# EAGLE board AQETHBluePill_w_RESET_MOD4ELECROW (EAGLE 6.5.0)
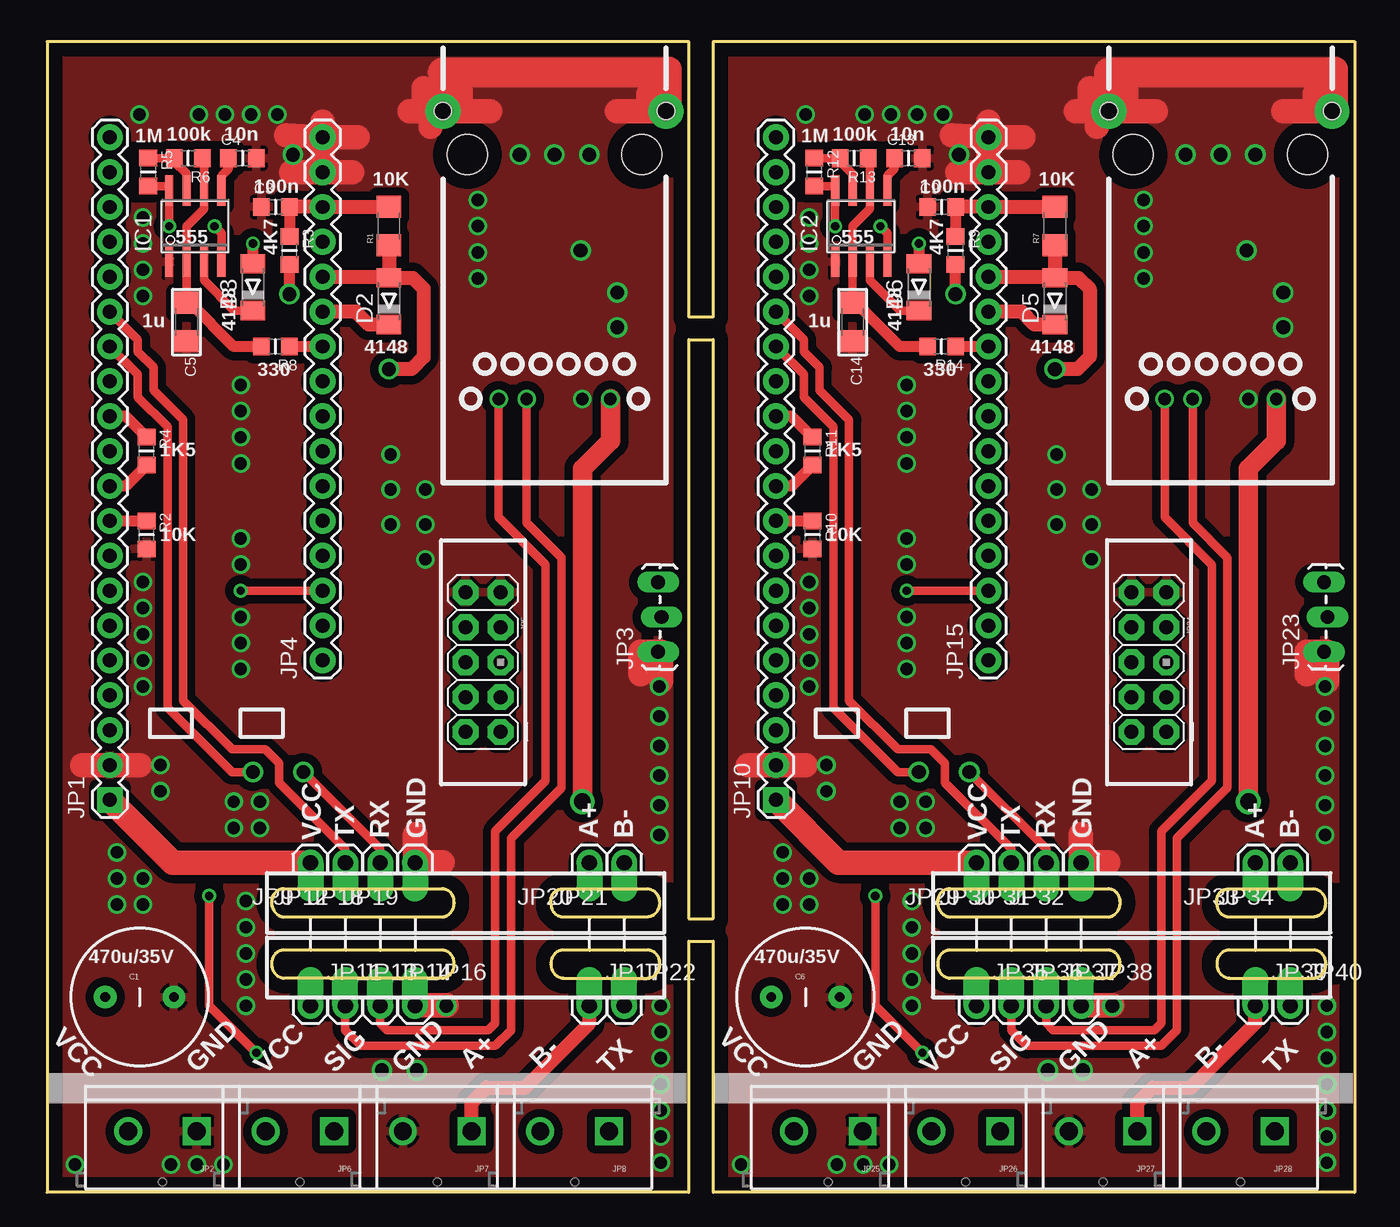
[diagram p0: board, top side]
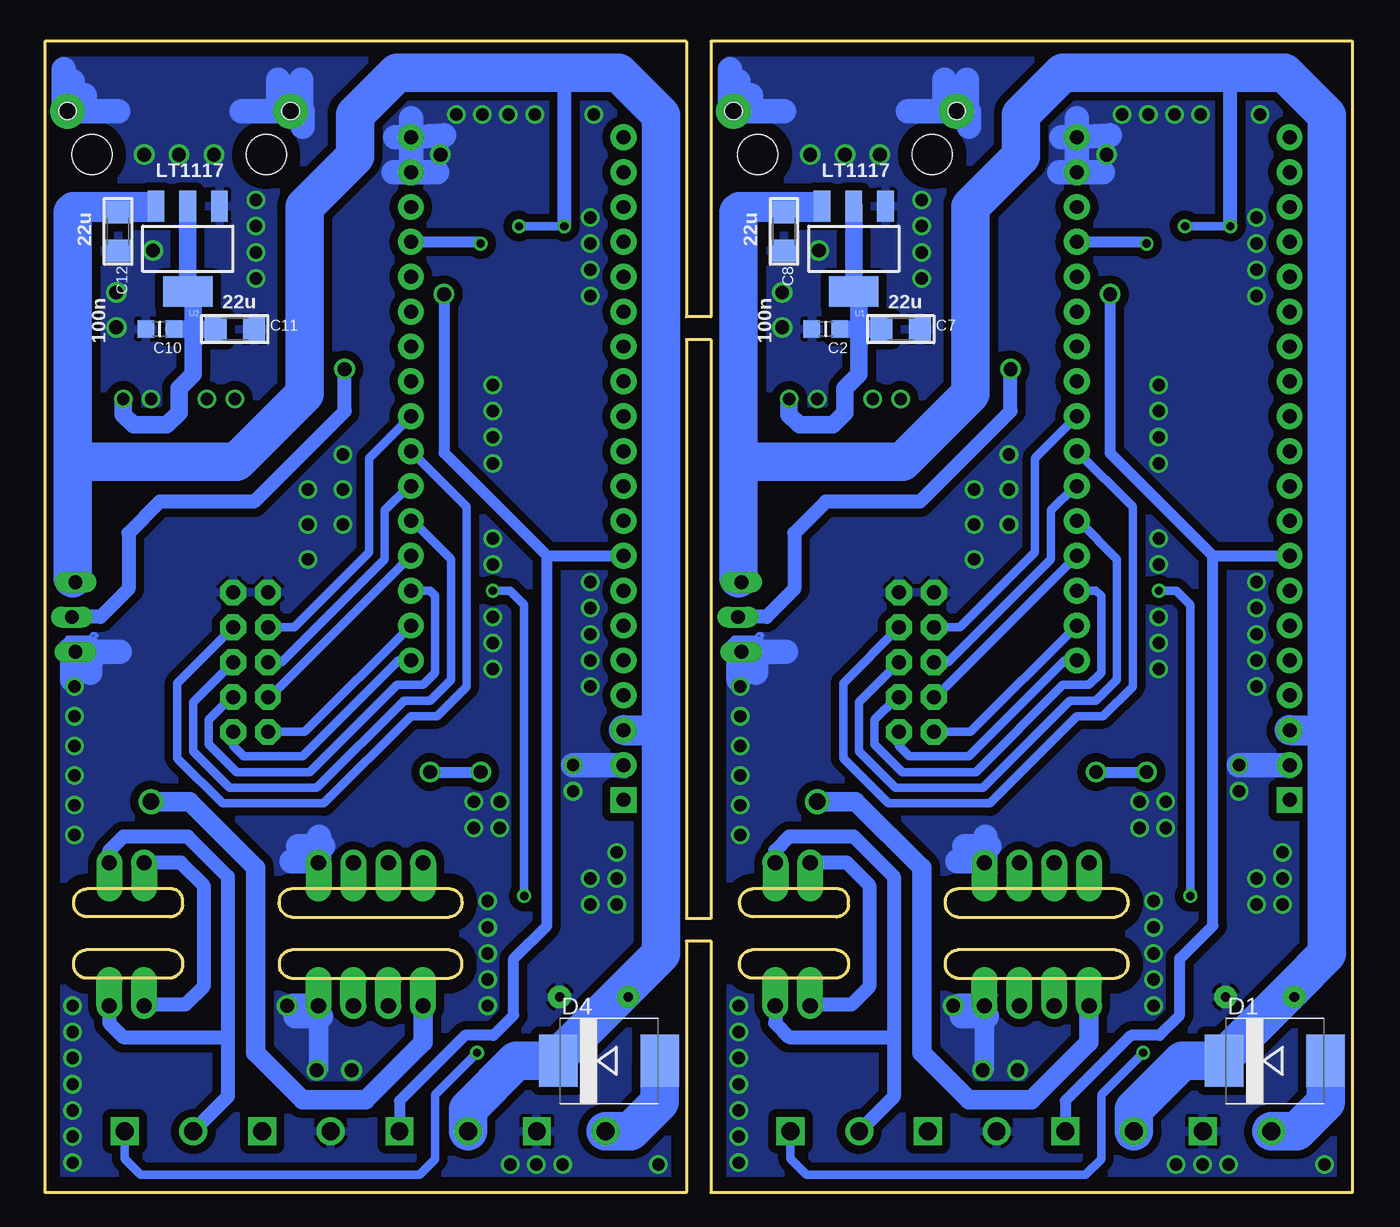
[diagram p1: board, bottom side, seen from below]

Size 95.25 x 83.82 mm. Coordinates in mm from the lower left corner, seen from the top.
Outline: 37.59,15.6 43.74,15.6 arc90 44.63,16.64 arc90 43.74,17.65 37.59,17.65 arc90 36.7,16.64 arc90 37.62,15.6
Outline: 86.11,15.6 92.25,15.6 arc90 93.14,16.64 arc90 92.25,17.65 86.11,17.65 arc90 85.22,16.64 arc90 86.13,15.6
Outline: 46.74,83.82 46.74,63.75 48.51,63.75 48.51,83.82 95.25,83.82 95.25,0 48.51,0 48.51,18.29 46.74,18.29 46.74,0 0,0 0,83.82 46.74,83.82
Outline: 46.74,62.1 46.74,19.94 48.51,19.94 48.51,62.1 46.74,62.1
Outline: 17.25,17.65 28.75,17.65 arc-90 29.64,16.64 arc-90 28.75,15.6 17.27,15.6 arc-90 16.36,16.64 arc-90 17.25,17.65
Outline: 37.47,22.1 43.69,22.1 arc-90 44.63,21.08 arc-90 43.69,20.07 37.59,20.07 arc-90 36.7,20.95 36.7,21.21 arc-90 37.47,22.1
Outline: 17.25,22.1 28.75,22.1 arc-90 29.64,21.21 arc-90 28.75,20.04 17.27,20.04 arc-90 16.36,21.21 arc-90 17.25,22.1
Outline: 65.76,17.65 77.27,17.65 arc-90 78.16,16.64 arc-90 77.27,15.6 65.79,15.6 arc-90 64.87,16.64 arc-90 65.76,17.65
Outline: 85.98,22.1 92.2,22.1 arc-90 93.14,21.08 arc-90 92.2,20.07 86.11,20.07 arc-90 85.22,20.95 85.22,21.21 arc-90 85.98,22.1
Outline: 65.76,22.1 77.27,22.1 arc-90 78.16,21.21 arc-90 77.27,20.04 65.79,20.04 arc-90 64.87,21.21 arc-90 65.76,22.1
Copper layers (1*16): Top 0.035mm / dielectric 1.5mm / Bottom 0.035mm
Design rules "default *": minimum track width 10mil, minimum drill 24mil, track to track 8mil, track to pad 8mil, pad to pad 8mil, via to via 8mil, smd to smd 8mil, copper to edge 40mil, drill to drill 8mil, minimum pad ring 10mil, minimum via ring 8mil, stop-mask expansion 4mil, vias tented up to drill 24mil, thermal gap 10mil
Holes 1.27 mm at 45.09,78.74 28.83,78.74 93.6,78.74 77.34,78.74
Holes 2.92 mm at 30.61,75.56 43.31,75.56 79.12,75.56 91.82,75.56

## Footprints (pad centres in the part's own frame; a part is rotated, then mirrored left to right if it is on the bottom)
CAP-PTH-5MM = drill 0.7 pad 1.651: 1 -2.5,0; 2 2.5,0
_0805MP = smd 1.2 x 1.3: 1 -1.016,0; 2 1.016,0
1206 = smd 1.6 x 1.8: 1 -1.4,0; 2 1.4,0
SMC = smd 2.8 x 3.8: A 3.7,0; C -3.7,0
MINIMELF = smd 1.4 x 1.8: A 1.7,0; C -1.7,0
SOIC-8 = smd 0.6 x 2.2: 1 -1.905,-2.6; 2 -0.635,-2.6; 3 0.635,-2.6; 4 1.905,-2.6; 5 1.905,2.6; 6 0.635,2.6; 7 -0.635,2.6; 8 -1.905,2.6
1X20 = drill 1.016 pad 1.88 square: 1 0,0 | drill 1.016 pad 1.88: 2 2.54,0; 3 5.08,0; 4 7.62,0; 5 10.16,0; 6 12.7,0; 7 15.24,0; 8 17.78,0; 9 20.32,0; 10 22.86,0; 11 25.4,0; 12 27.94,0; 13 30.48,0; 14 33.02,0; 15 35.56,0; 16 38.1,0; 17 40.64,0; 18 43.18,0; 19 45.72,0; 20 48.26,0
SCREWTERMINAL-5MM-2 = drill 1.3 pad 2.032 square: 1 0,0 | drill 1.3 pad 2.032: 2 5,0
1X03_LOCK_LONGPADS = drill 1.016 long: 1 0,0; 2 2.54,-0.254; 3 5.08,0
1X16 = drill 1.016 pad 1.88: 1 0,0; 2 2.54,0; 3 5.08,0; 4 7.62,0; 5 10.16,0; 6 12.7,0; 7 15.24,0; 8 17.78,0; 9 20.32,0; 10 22.86,0; 11 25.4,0; 12 27.94,0; 13 30.48,0; 14 33.02,0; 15 35.56,0; 16 38.1,0
AVR_ICSP = drill 1.016 pad 1.88 octagon: 1 -1.27,5.08; 2 1.27,5.08; 3 -1.27,2.54; 4 1.27,2.54; 5 -1.27,0; 6 1.27,0; 7 -1.27,-2.54; 8 1.27,-2.54; 9 -1.27,-5.08; 10 1.27,-5.08
1X01_OFFSET = drill 1.118 pad 1.88 offset: 1 0,0
SOT223 = smd 1.219 x 2.235: 1 -2.311,-3.099; 2 0,-3.099; 3 2.311,-3.099 | smd 3.6 x 2.2: 4 0,3.099

## Placement (x,y rotation side)
C1  470uF/35V  [CAP-PTH-5MM]  6.73,14.22 0 top
C2  100n  [_0805MP]  38.35,62.87 180 bottom
C3  100n  [_0805MP]  16.64,71.75 0 top
C4  10n  [_0805MP]  14.22,75.31 0 top
C5  1u  [1206]  10.16,63.37 270 top
C6  470uF/35V  [CAP-PTH-5MM]  55.24,14.22 0 top
C7  22u  [1206]  32.89,62.87 0 bottom
C8  22u  [1206]  41.4,69.98 270 bottom
C9  100n  [_0805MP]  65.15,71.75 0 top
C10  100n  [_0805MP]  86.87,62.87 180 bottom
C11  22u  [1206]  81.41,62.87 0 bottom
C12  22u  [1206]  89.92,69.98 270 bottom
C13  10n  [_0805MP]  62.74,75.31 0 top
C14  1u  [1206]  58.67,63.37 270 top
D1  SS34  [SMC]  5.64,9.58 0 bottom
D2  1N4148  [MINIMELF]  24.89,64.9 90 top
D3  1N4148  [MINIMELF]  14.99,65.91 90 top
D4  SS34  [SMC]  54.15,9.58 0 bottom
D5  1N4148  [MINIMELF]  73.41,64.9 90 top
D6  1N4148  [MINIMELF]  63.5,65.91 90 top
IC1  IC_555-SOIC8  [SOIC-8]  10.79,70.36 0 top
IC2  IC_555-SOIC8  [SOIC-8]  59.31,70.36 0 top
JP1  M20  [1X20]  4.57,28.57 90 top
JP2  [SCREWTERMINAL-5MM-2]  10.9,4.45 180 top
JP3  [1X03_LOCK_LONGPADS]  44.5,39.36 90 top
JP4  M16PTH  [1X16]  20.07,38.73 90 top
JP5  M05X2PTH  [AVR_ICSP]  31.75,38.61 180 top
JP6  [SCREWTERMINAL-5MM-2]  20.9,4.45 180 top
JP7  [SCREWTERMINAL-5MM-2]  30.91,4.45 180 top
JP8  [SCREWTERMINAL-5MM-2]  40.92,4.45 180 top
JP9  M01OFFSET  [1X01_OFFSET]  19.18,24 180 top
JP10  M20  [1X20]  53.09,28.57 90 top
JP11  M01OFFSET  [1X01_OFFSET]  19.18,13.59 0 top
JP12  M01OFFSET  [1X01_OFFSET]  21.72,24 180 top
JP13  M01OFFSET  [1X01_OFFSET]  21.72,13.59 0 top
JP14  M01OFFSET  [1X01_OFFSET]  24.26,13.59 0 top
JP15  M16PTH  [1X16]  68.58,38.73 90 top
JP16  M01OFFSET  [1X01_OFFSET]  26.8,13.59 0 top
JP17  M01OFFSET  [1X01_OFFSET]  39.5,13.59 0 top
JP18  M01OFFSET  [1X01_OFFSET]  24.26,24 180 top
JP19  M01OFFSET  [1X01_OFFSET]  26.8,24 180 top
JP20  M01OFFSET  [1X01_OFFSET]  39.5,24 180 top
JP21  M01OFFSET  [1X01_OFFSET]  42.04,24 180 top
JP22  M01OFFSET  [1X01_OFFSET]  42.04,13.59 0 top
JP23  [1X03_LOCK_LONGPADS]  93.01,39.36 90 top
JP24  M05X2PTH  [AVR_ICSP]  80.26,38.61 180 top
JP25  [SCREWTERMINAL-5MM-2]  59.41,4.45 180 top
JP26  [SCREWTERMINAL-5MM-2]  69.42,4.45 180 top
JP27  [SCREWTERMINAL-5MM-2]  79.43,4.45 180 top
JP28  [SCREWTERMINAL-5MM-2]  89.43,4.45 180 top
JP29  M01OFFSET  [1X01_OFFSET]  67.69,24 180 top
JP30  M01OFFSET  [1X01_OFFSET]  70.23,24 180 top
JP31  M01OFFSET  [1X01_OFFSET]  72.77,24 180 top
JP32  M01OFFSET  [1X01_OFFSET]  75.31,24 180 top
JP33  M01OFFSET  [1X01_OFFSET]  88.01,24 180 top
JP34  M01OFFSET  [1X01_OFFSET]  90.55,24 180 top
JP35  M01OFFSET  [1X01_OFFSET]  67.69,13.59 0 top
JP36  M01OFFSET  [1X01_OFFSET]  70.23,13.59 0 top
JP37  M01OFFSET  [1X01_OFFSET]  72.77,13.59 0 top
JP38  M01OFFSET  [1X01_OFFSET]  75.31,13.59 0 top
JP39  M01OFFSET  [1X01_OFFSET]  88.01,13.59 0 top
JP40  M01OFFSET  [1X01_OFFSET]  90.55,13.59 0 top
R1  10K  [1206]  24.89,70.36 90 top
R2  10K  [_0805MP]  7.24,47.88 270 top
R3  4k7  [_0805MP]  17.65,68.58 270 top
R4  1K5  [_0805MP]  7.24,53.98 270 top
R5  1M  [_0805MP]  7.37,74.3 270 top
R6  100K  [_0805MP]  10.29,75.31 180 top
R7  10K  [1206]  73.41,70.36 90 top
R8  330  [_0805MP]  16.64,61.59 180 top
R9  4k7  [_0805MP]  66.17,68.58 270 top
R10  10K  [_0805MP]  55.75,47.88 270 top
R11  1K5  [_0805MP]  55.75,53.98 270 top
R12  1M  [_0805MP]  55.88,74.3 270 top
R13  100K  [_0805MP]  58.8,75.31 180 top
R14  330  [_0805MP]  65.15,61.59 180 top
U1  [SOT223]  36.32,68.71 180 bottom
U2  [SOT223]  84.84,68.71 180 bottom

## Library data of the parts
C1 C6 R1 R7 = SparkFun-Passives
C2-C5 C7-C14 R2-R6 R8-R14 = microbuilder
D1-D6 = diode
IC1 IC2 = dp_devices
JP1-JP40 = SparkFun-Connectors
U1 U2 = SparkFun-PowerIC; PROD_ID: VREG-08170

## Nets
3.3V: C3.2 JP4.14 R1.2 R3.1
3.3V1: C9.2 JP15.14 R7.2 R9.1
3V3_SECOND: JP1.1 JP9.1
3V3_SECOND1: JP10.1 JP29.1
5V: C1.1 C8.1 D1.C IC1.4 IC1.8 JP1.3 JP3.3 JP6.2 R5.2 U1.3
5V1: C6.1 C12.1 D4.C IC2.4 IC2.8 JP10.3 JP23.3 JP26.2 R12.2 U2.3
+A_1: JP27.1 JP33.1 JP39.1
+A_485: JP7.1 JP17.1 JP20.1
-B_1: JP28.2 JP34.1 JP40.1
-B_485: JP8.2 JP21.1 JP22.1
CTRL: C4.1 IC1.5
CTRL1: C13.1 IC2.5
DS18S20_SIGNAL_PIN: JP1.8 JP6.1 R3.2
DS18S20_SIGNAL_PIN1: JP10.8 JP26.1 R9.2
GND: C1.2 C2.2 C3.1 C4.2 C5.2 C7.2 C8.2 IC1.1 JP1.2 JP2.1 JP3.1 JP4.15 JP4.16 JP5.9 JP5.10 JP7.2 JP16.1 JP19.1 R2.2 U1.1
GND2: C6.2 C9.1 C10.2 C11.2 C12.2 C13.2 C14.2 IC2.1 JP10.2 JP15.15 JP15.16 JP23.1 JP24.9 JP24.10 JP25.1 JP27.2 JP32.1 JP38.1 R10.2 U2.1
HEARTBEAT: JP4.10 R8.1
HEARTBEAT1: JP15.10 R14.1
K1: JP4.1 JP5.1
K2: JP4.2 JP5.2
K3: JP15.1 JP24.1
K3_OR_TX1: JP15.3 JP24.3 JP28.1
K3_OR_TX2: JP4.3 JP5.3 JP8.1
K4: JP4.4 JP5.4
K5: JP4.5 JP5.5
K6: JP4.6 JP5.6
K7: JP4.7 JP5.7
K8: JP4.8 JP5.8
K9: JP15.2 JP24.2
K10: JP15.4 JP24.4
K11: JP15.5 JP24.5
K12: JP15.6 JP24.6
K13: JP15.7 JP24.7
K14: JP15.8 JP24.8
N$1: JP1.10 R4.2
N$2: JP1.9 R2.1
N$3: JP1.12 R4.1
N$4: JP10.9 R10.1
N$5: D4.A JP25.2
N$6: C5.1 IC1.2 IC1.6 R6.1 R8.2
N$7: D3.C IC1.3
N$8: IC1.7 R5.1 R6.2
N$9: JP10.10 R11.2
N$10: JP10.12 R11.1
N$11: C14.1 IC2.2 IC2.6 R13.1 R14.2
N$12: D1.A JP2.2
N$13: D6.C IC2.3
N$14: IC2.7 R12.1 R13.2
PB10_TX1: D5.C JP15.11
PB10_TX3: D2.C JP4.11
PB11_RX1: D5.A JP15.12 JP23.2 R7.1
PB11_RX3: D2.A JP3.2 JP4.12 R1.1
RESET: D3.A JP4.13
RESET1: D6.A JP15.13
RX: JP14.1
RX1: JP1.14 JP18.1
RX2: JP10.14 JP31.1
RX3: JP37.1
TX: JP13.1
TX1: JP1.15 JP12.1
TX2: JP10.15 JP30.1
TX3: JP36.1
VCC: C2.1 C7.1 JP11.1 U1.2 U1.4
VCC1: C10.1 C11.1 JP35.1 U2.2 U2.4

## Tracks (layer width: path | path; a pad name or v marks a point on that pad's centre or on a via)
3.3V
  Top 0.813: C3.2 R3.1
  Top 1.016: R1.2 JP4.14 C3.2
3.3V1
  Top 0.813: C9.2 R9.1
  Top 1.016: R7.2 JP15.14 C9.2
3V3_SECOND
  Top 1.778: JP1.1 9.14,24 JP9.1
3V3_SECOND1
  Top 1.778: JP10.1 57.66,24 JP29.1
5V  (via drill 0.6)
  Top 0.61: IC1.4 12.7,69.85 v12.19,70.36 | R5.2 8.89,73.28 IC1.8 v8.89,70.36
  Bottom 0.61: C8.1 38.63,71.38 U1.3 38.63,71.75 39.12,71.75 | v12.19,70.36 v8.89,70.36
  Bottom 0.813: JP3.3 44.7,44.44 44.7,44.7
  Bottom 1.016: v8.89,70.36 8.89,81.53 8.76,81.53
  Bottom 1.422: C1.1 4.27,14.95
  Bottom 2.184: JP1.3 1.86,33.66 1.86,33.53 | 44.7,71.37 44.7,71.75 39.12,71.75
  Bottom 2.794: 44.7,71.37 44.7,53.21 | 44.7,53.21 44.7,44.7 | 44.7,53.21 32.77,53.21 27.81,58.17 27.81,71.75 24.13,75.44 24.13,78.49 21.08,81.53 8.76,81.53 4.95,81.53 1.86,78.44 1.86,33.53 1.86,17.36 4.27,14.95 9.34,9.88 D1.C 12.39,9.58 15.9,6.07 JP6.2
5V1  (via drill 0.6)
  Top 0.61: IC2.4 61.21,69.85 v60.71,70.36 | R12.2 57.4,73.28 IC2.8 v57.4,70.36
  Bottom 0.61: C12.1 87.15,71.38 U2.3 87.15,71.75 87.63,71.75 | v60.71,70.36 v57.4,70.36
  Bottom 0.813: JP23.3 93.22,44.44 93.22,44.7
  Bottom 1.016: v57.4,70.36 57.4,81.53 57.28,81.53
  Bottom 1.422: C6.1 52.78,14.95
  Bottom 2.184: JP10.3 50.37,33.66 50.37,33.53 | 93.22,71.37 93.22,71.75 87.63,71.75
  Bottom 2.794: 93.22,71.37 93.22,53.21 | 93.22,53.21 93.22,44.7 | 93.22,53.21 81.28,53.21 76.33,58.17 76.33,71.75 72.64,75.44 72.64,78.49 69.6,81.53 57.28,81.53 53.47,81.53 50.37,78.44 50.37,33.53 50.37,17.36 52.78,14.95 57.85,9.88 D4.C 60.91,9.58 64.42,6.07 JP26.2
+A_1
  Top 1.016: JP27.1 79.43,6.53 80.52,7.62 83.31,7.62 88.01,12.32 JP39.1
  Bottom 1.016: JP33.1 85.34,24 83.69,22.35 83.69,14.99 85.02,13.66 87.94,13.66 JP39.1
+A_485
  Top 1.016: JP7.1 30.91,6.53 32,7.62 34.8,7.62 39.5,12.32 JP17.1
  Bottom 1.016: JP20.1 36.83,24 35.18,22.35 35.18,14.99 36.5,13.66 39.42,13.66 JP17.1
-B_1
  Bottom 1.016: JP34.1 90.55,24.89 89.53,25.91 84.84,25.91 81.92,22.99 81.92,11.43 | 81.92,11.43 81.92,6.96 JP28.2 | JP40.1 90.55,12.32 89.53,11.3 82.04,11.3 81.92,11.43
-B_485
  Bottom 1.016: JP21.1 42.04,24.89 41.02,25.91 36.32,25.91 33.4,22.99 33.4,11.43 | 33.4,11.43 33.4,6.96 JP8.2 | JP22.1 42.04,12.32 41.02,11.3 33.53,11.3 33.4,11.43
CTRL
  Top 0.61: C4.1 13.21,74.55 12.7,74.04 IC1.5
CTRL1
  Top 0.61: C13.1 61.72,74.55 61.21,74.04 IC2.5
DS18S20_SIGNAL_PIN  (via drill 1)
  Top 0.813: v17.65,65.41 R3.2
  Bottom 0.813: 10.16,46.35 10.16,19.43 12.57,17.02 12.57,12.9 14.05,11.43 16.13,11.43 20.9,6.66 JP6.1 | 10.16,46.35 JP1.8 | 10.16,46.35 17.65,53.85 v17.65,65.41
DS18S20_SIGNAL_PIN1  (via drill 1)
  Top 0.813: v66.17,65.41 R9.2
  Bottom 0.813: 58.67,46.35 58.67,19.43 61.09,17.02 61.09,12.9 62.56,11.43 64.64,11.43 69.42,6.66 JP26.1 | 58.67,46.35 JP10.8 | 58.67,46.35 66.17,53.85 v66.17,65.41
GND  (via drill 0.9, 1, 1.3 pad 2.54)
  Top 1.778: 6.73,31.11 JP1.2 2.54,31.11 | JP4.16 17.4,76.96 | JP4.16 22.61,76.83 | JP4.15 17.78,74.3 | JP4.15 22.23,74.3 | JP4.15 JP4.16 | JP4.16 20.07,77.98 | v28.83,78.74 26.42,78.74 | v28.83,78.74 32.26,78.74 | v45.09,78.74 41.53,78.74 | v28.83,78.74 27.43,78.74 27.43,80.39 | v28.83,78.74 30.1,78.74 30.1,80.26 | v45.09,78.74 43.81,78.74 43.81,80.01 | v45.09,78.74 45.34,78.74 45.34,81.79 | v28.83,78.74 27.94,78.74 27.94,77.6 | 44.73,37.21 44.73,39.37 43.23,39.37 43.23,37.72 | 28.8,24.05 26.77,24.05 | 26.8,26.06 26.8,24.03 | 29.08,13.61 27.05,13.61
  Top 2.184: v45.09,78.74 45.09,81.53 28.83,81.53 v28.83,78.74
  Bottom 0.203: 43,40.34 43.28,40.34 43.36,40.41 43.36,40.36 43.41,40.31 45.06,40.31 | 45.06,40.31 45.39,39.98 45.16,39.98 | 45.16,39.98 44.93,40.21 | 42.9,40.54 43.03,40.54 43.03,40.69 43.28,40.69 43.54,40.44 | 43.56,40.41 43.54,40.44 | 43.54,40.44 45.06,40.44 | 45.74,39.8 45.11,40.44 45.06,40.44 | 45.06,40.44 45.06,40.31 | 45.16,39.98 44.5,39.98 JP3.1
  Bottom 1.422: JP16.1 26.8,9.02 v26.92,8.89
  Bottom 1.778: JP1.2 v8.26,31.11 | JP4.16 21.21,76.83 | JP4.15 21.34,74.3 | JP4.15 18.16,74.3 | JP4.16 17.65,76.96 | JP4.15 JP4.16 | JP4.16 20.07,78.23 | v45.09,78.74 44.7,78.74 44.7,80.9 | v45.09,78.74 41.4,78.74 | v45.09,78.74 43.81,78.74 43.81,79.88 | v45.09,78.74 45.34,78.74 45.34,81.79 | v28.83,78.74 27.94,78.74 27.94,77.6 | v28.83,78.74 32.38,78.74 | v28.83,78.74 28.07,78.74 28.07,81.03 | v28.83,78.74 29.72,78.74 29.72,81.03 | 44.45,39.24 44.73,39.24 44.73,37.34 | 42.7,39.37 41.27,39.37 | 44.37,39.37 43.43,39.37 | 43.43,39.37 43.43,37.85 | 44.58,39.37 JP3.1 | JP3.1 44.37,39.37 | 44.37,39.37 44.37,39.34 44.5,39.34 JP3.1 | 43.43,39.37 42.7,39.37 | 42.7,39.37 42.7,39.29 | 26.77,13.59 28.6,13.59 | 26.62,12.83 28.45,12.83 | 26.44,25.2 28.27,25.2 | 26.75,24.05 26.75,25.88 | 28.75,24.11 26.92,24.11
  other vias: 38.99,57.78 41.53,65.53 24.38,8.89 41.53,62.99 14.48,13.59 14.48,15.49 13.59,26.54 44.7,11.68 44.58,28.19 44.58,32.51 44.58,36.83 25.02,53.72 25.02,51.18 25.02,48.64 6.99,67.18 6.99,70.99 12.95,78.49 31.37,70.36 36.96,75.56 6.99,44.45 6.99,42.55 6.99,40.64 6.99,38.73 6.99,36.83 11.05,78.49 6.73,78.49 14.86,78.49 6.99,69.09 31.37,66.55 31.37,68.45 38.86,68.58 34.42,75.56 39.5,75.56 44.58,34.67 44.7,9.78 44.58,26.04 44.7,13.59 44.58,30.35 5.08,24.77 5.08,22.86 5.08,20.95 6.99,22.86 6.99,20.95 14.48,19.3 14.48,17.4 27.56,51.18 27.56,48.64 27.56,46.1 17.91,75.56 14.1,54.99 14.1,56.9 14.1,53.09 14.1,47.62 14.1,45.72 14.1,41.91 14.1,40.01 14.1,38.1 14.1,58.8 13.59,28.45 15.49,28.45 15.49,26.54 14.48,21.21 8.26,29.21 6.99,65.28 16.76,78.49 31.37,72.26 10.92,2.03 12.83,2.03 9.02,2.03 2.03,2.03 44.7,7.87 44.7,5.97 44.7,4.06 44.7,2.16 29.08,13.59
  pour Bottom (isolate 0.61): 0,0 46.74,0 46.74,83.82 0,83.82
  pour Top (isolate 0.61): 0,83.82 46.74,83.82 46.74,0 0,0
GND2  (via drill 0.9, 1, 1.3 pad 2.54)
  Top 1.778: 55.24,31.11 JP10.2 51.05,31.11 | JP15.16 65.91,76.96 | JP15.16 71.12,76.83 | JP15.15 66.29,74.3 | JP15.15 70.74,74.3 | JP15.15 JP15.16 | JP15.16 68.58,77.98 | v77.34,78.74 74.93,78.74 | v77.34,78.74 80.77,78.74 | v93.6,78.74 90.04,78.74 | v77.34,78.74 75.95,78.74 75.95,80.39 | v77.34,78.74 78.61,78.74 78.61,80.26 | v93.6,78.74 92.33,78.74 92.33,80.01 | v93.6,78.74 93.85,78.74 93.85,81.79 | v77.34,78.74 76.45,78.74 76.45,77.6 | 93.24,37.21 93.24,39.37 91.75,39.37 91.75,37.72 | 77.32,24.05 75.29,24.05 | 75.31,26.06 75.31,24.03 | 77.6,13.61 75.56,13.61
  Top 2.184: v93.6,78.74 93.6,81.53 77.34,81.53 v77.34,78.74
  Bottom 0.203: 91.52,40.34 91.8,40.34 91.87,40.41 91.87,40.36 91.92,40.31 93.57,40.31 | 93.57,40.31 93.9,39.98 93.67,39.98 | 93.67,39.98 93.45,40.21 | 91.42,40.54 91.54,40.54 91.54,40.69 91.8,40.69 92.05,40.44 | 92.08,40.41 92.05,40.44 | 92.05,40.44 93.57,40.44 | 94.26,39.8 93.62,40.44 93.57,40.44 | 93.57,40.44 93.57,40.31 | 93.67,39.98 93.02,39.98 JP23.1
  Bottom 1.422: JP38.1 75.31,9.02 v75.44,8.89
  Bottom 1.778: JP10.2 v56.77,31.11 | JP15.16 69.72,76.83 | JP15.15 69.85,74.3 | JP15.15 66.67,74.3 | JP15.16 66.17,76.96 | JP15.15 JP15.16 | JP15.16 68.58,78.23 | v93.6,78.74 93.22,78.74 93.22,80.9 | v93.6,78.74 89.92,78.74 | v93.6,78.74 92.33,78.74 92.33,79.88 | v93.6,78.74 93.85,78.74 93.85,81.79 | v77.34,78.74 76.45,78.74 76.45,77.6 | v77.34,78.74 80.9,78.74 | v77.34,78.74 76.58,78.74 76.58,81.03 | v77.34,78.74 78.23,78.74 78.23,81.03 | 92.96,39.24 93.24,39.24 93.24,37.34 | 91.21,39.37 89.79,39.37 | 92.89,39.37 91.95,39.37 | 91.95,39.37 91.95,37.85 | 93.09,39.37 JP23.1 | JP23.1 92.89,39.37 | 92.89,39.37 92.89,39.34 93.02,39.34 JP23.1 | 91.95,39.37 91.21,39.37 | 91.21,39.37 91.21,39.29 | 75.29,13.59 77.11,13.59 | 75.13,12.83 76.96,12.83 | 74.95,25.2 76.78,25.2 | 75.26,24.05 75.26,25.88 | 77.27,24.11 75.44,24.11
  other vias: 87.5,57.78 90.04,65.53 72.9,8.89 90.04,62.99 62.99,13.59 62.99,15.49 62.1,26.54 93.22,11.68 93.09,28.19 93.09,32.51 93.09,36.83 73.53,53.72 73.53,51.18 73.53,48.64 55.5,67.18 55.5,70.99 61.47,78.49 79.88,70.36 85.47,75.56 55.5,44.45 55.5,42.55 55.5,40.64 55.5,38.73 55.5,36.83 59.56,78.49 55.24,78.49 63.37,78.49 55.5,69.09 79.88,66.55 79.88,68.45 87.38,68.58 82.93,75.56 88.01,75.56 93.09,34.67 93.22,9.78 93.09,26.04 93.22,13.59 93.09,30.35 53.59,24.77 53.59,22.86 53.59,20.95 55.5,22.86 55.5,20.95 62.99,19.3 62.99,17.4 76.07,51.18 76.07,48.64 76.07,46.1 66.42,75.56 62.61,54.99 62.61,56.9 62.61,53.09 62.61,47.62 62.61,45.72 62.61,41.91 62.61,40.01 62.61,38.1 62.61,58.8 62.1,28.45 64.01,28.45 64.01,26.54 62.99,21.21 56.77,29.21 55.5,65.28 65.28,78.49 79.88,72.26 59.44,2.03 61.34,2.03 57.53,2.03 50.55,2.03 93.22,7.87 93.22,5.97 93.22,4.06 93.22,2.16 77.6,13.59
  pour Bottom (isolate 0.61): 48.51,0 95.25,0 95.25,83.82 48.51,83.82
  pour Top (isolate 0.61): 48.51,83.82 95.25,83.82 95.25,0 48.51,0
HEARTBEAT
  Top 0.813: JP4.10 R8.1
HEARTBEAT1
  Top 0.813: JP15.10 R14.1
K1
  Bottom 0.61: JP4.1 20.95,38.73 27.94,31.75 32.26,31.75 33.02,32.51 JP5.1
K2
  Bottom 0.61: JP5.2 27.81,33.53 JP4.2
K3
  Bottom 0.61: JP15.1 69.47,38.73 76.45,31.75 80.77,31.75 81.53,32.51 JP24.1
K3_OR_TX1  (via drill 0.6)
  Top 0.61: v60.33,21.59 60.33,13.59 v63.75,10.16 | v62.61,43.81 JP15.3
  Bottom 0.61: JP15.3 67.18,43.81 66.8,43.43 66.8,37.85 67.69,36.96 69.6,36.96 75.95,30.61 81.28,30.61 83.31,32.64 83.31,34.42 81.66,36.07 JP24.3 | JP28.1 89.43,2.44 88.27,1.27 67.94,1.27 66.8,2.41 66.8,7.11 v63.75,10.16 | v60.33,21.59 60.33,42.8 61.34,43.81 v62.61,43.81
K3_OR_TX2  (via drill 0.6)
  Top 0.61: v11.81,21.59 11.81,13.59 v15.24,10.16 | v14.1,43.81 JP4.3
  Bottom 0.61: JP4.3 18.67,43.81 18.29,43.43 18.29,37.85 19.18,36.96 21.08,36.96 27.43,30.61 32.77,30.61 34.8,32.64 34.8,34.42 33.15,36.07 JP5.3 | JP8.1 40.92,2.44 39.75,1.27 19.43,1.27 18.29,2.41 18.29,7.11 v15.24,10.16 | v11.81,21.59 11.81,42.8 12.83,43.81 v14.1,43.81
K4
  Bottom 0.61: JP4.4 30.35,36.07 JP5.4
K5
  Bottom 0.61: JP4.5 19.94,48.9 17.14,46.1 17.14,37.34 18.67,35.81 20.57,35.81 26.92,29.46 33.27,29.46 35.94,32.13 35.94,35.69 JP5.5
K6
  Bottom 0.61: JP4.6 20.19,51.44 21.97,49.66 21.97,46.1 29.46,38.61 JP5.6
K7
  Bottom 0.61: JP4.7 16,49.91 16,36.83 18.16,34.67 20.07,34.67 26.42,28.32 33.78,28.32 37.08,31.62 37.08,37.08 JP5.7
K8
  Bottom 0.61: JP4.8 23.11,53.47 23.11,46.61 28.57,41.15 JP5.8
K9
  Bottom 0.61: JP24.2 76.33,33.53 JP15.2
K10
  Bottom 0.61: JP15.4 78.87,36.07 JP24.4
K11
  Bottom 0.61: JP15.5 68.45,48.9 65.66,46.1 65.66,37.34 67.18,35.81 69.09,35.81 75.44,29.46 81.79,29.46 84.45,32.13 84.45,35.69 JP24.5
K12
  Bottom 0.61: JP15.6 68.71,51.44 70.48,49.66 70.48,46.1 77.98,38.61 JP24.6
K13
  Bottom 0.61: JP15.7 64.52,49.91 64.52,36.83 66.67,34.67 68.58,34.67 74.93,28.32 82.3,28.32 85.6,31.62 85.6,37.08 JP24.7
K14
  Bottom 0.61: JP15.8 71.63,53.47 71.63,46.61 77.09,41.15 JP24.8
N$1
  Top 0.813: R4.2 5.71,51.44 JP1.10
N$2
  Top 0.813: JP1.9 R2.1
N$3
  Top 0.813: R4.1 5.71,56.52 JP1.12
N$4
  Top 0.813: JP10.9 R10.1
N$5
  Bottom 2.794: JP25.2 52.58,4.45 50.45,6.57 D4.A
N$6
  Top 0.61: R6.1 11.43,75.31 IC1.6 11.43,71.63 10.16,70.36 IC1.2 C5.1
  Top 0.813: R8.2 13.59,61.59 10.41,64.77 C5.1
N$7
  Top 0.61: IC1.3 11.43,66.42 13.64,64.21 D3.C
N$8
  Top 0.61: R5.1 R6.2 9.27,75.06 10.16,74.17 IC1.7
N$9
  Top 0.813: R11.2 54.23,51.44 JP10.10
N$10
  Top 0.813: R11.1 54.23,56.52 JP10.12
N$11
  Top 0.61: R13.1 59.94,75.31 IC2.6 59.94,71.63 58.67,70.36 IC2.2 C14.1
  Top 0.813: R14.2 62.1,61.59 58.92,64.77 C14.1
N$12
  Bottom 2.794: JP2.2 4.06,4.45 1.94,6.57 D1.A
N$13
  Top 0.61: IC2.3 59.94,66.42 62.15,64.21 D6.C
N$14
  Top 0.61: R12.1 R13.2 57.78,75.06 58.67,74.17 IC2.7
PB10_TX1
  Top 1.016: D5.C 71.93,63.2 70.99,64.14 JP15.11
PB10_TX3
  Top 1.016: D2.C 23.42,63.2 22.48,64.14 JP4.11
PB11_RX1  (via drill 1)
  Top 1.016: JP15.12 73.33,66.67 D5.A | R7.1 D5.A | D5.A 75.14,66.6 75.95,65.79 75.95,60.83 75.06,59.94 v73.41,59.94
  Bottom 1.016: v73.41,59.94 73.41,56.9 80.01,50.29 86.87,50.29 89.15,48.01 89.15,43.94 91.19,41.91 93.26,41.91 JP23.2
PB11_RX3  (via drill 1)
  Top 1.016: JP4.12 24.81,66.67 D2.A | R1.1 D2.A | D2.A 26.62,66.6 27.43,65.79 27.43,60.83 26.54,59.94 v24.89,59.94
  Bottom 1.016: v24.89,59.94 24.89,56.9 31.5,50.29 38.35,50.29 40.64,48.01 40.64,43.94 42.67,41.91 JP3.2
RESET  (via drill 0.6)
  Top 0.813: v14.99,69.09 D3.A
  Bottom 0.61: 14.99,69.22 v14.99,69.09
  Bottom 0.813: JP4.13 14.99,69.22
RESET1  (via drill 0.6)
  Top 0.813: v63.5,69.09 D6.A
  Bottom 0.61: 63.5,69.22 v63.5,69.09
  Bottom 0.813: JP15.13 63.5,69.22
RX  (via drill 0.9)
  Top 0.61: v32.89,57.78 32.89,49.15 36.32,45.72 36.32,29.97 32.64,26.29 32.64,12.32 32.13,11.81 24.77,11.81 24.26,12.32 JP14.1
RX1  (via drill 1)
  Top 0.61: JP18.1 24.26,25.02 v18.67,30.61 | v14.99,30.61 13.46,30.61 8.76,35.31 8.76,55.75 6.6,57.91 6.6,59.56 JP1.14
  Bottom 0.813: v18.67,30.61 v14.99,30.61
RX2  (via drill 1)
  Top 0.61: JP31.1 72.77,25.02 v67.18,30.61 | v63.5,30.61 61.98,30.61 57.28,35.31 57.28,55.75 55.12,57.91 55.12,59.56 JP10.14
  Bottom 0.813: v67.18,30.61 v63.5,30.61
RX3  (via drill 0.9)
  Top 0.61: v81.41,57.78 81.41,49.15 84.84,45.72 84.84,29.97 81.15,26.29 81.15,12.32 80.64,11.81 73.28,11.81 72.77,12.32 JP37.1
TX  (via drill 0.9)
  Top 0.61: v34.92,57.78 34.92,48.77 37.47,46.23 37.47,29.46 33.78,25.78 33.78,11.81 32.64,10.67 22.86,10.67 21.72,11.81 JP13.1
TX1
  Top 0.61: JP12.1 21.72,25.02 16.89,29.84 16.89,31.24 15.88,32.26 13.46,32.26 9.91,35.81 9.91,56.26 7.75,58.42 7.75,60.07 6.6,61.21 6.6,62.1 JP1.15
TX2
  Top 0.61: JP30.1 70.23,25.02 65.41,29.84 65.41,31.24 64.39,32.26 61.98,32.26 58.42,35.81 58.42,56.26 56.26,58.42 56.26,60.07 55.12,61.21 55.12,62.1 JP10.15
TX3  (via drill 0.9)
  Top 0.61: v83.44,57.78 83.44,48.77 85.98,46.23 85.98,29.46 82.3,25.78 82.3,11.81 81.15,10.67 71.37,10.67 70.23,11.81 JP36.1
VCC  (via drill 0.9, 1.2)
  Top 1.422: v41.02,57.78 41.02,54.74 38.99,52.7 v38.99,28.45
  Bottom 1.27: U1.2 U1.4 35.94,65.61 35.94,62.87 | v41.02,57.78 41.02,56.64 40.26,55.88 37.85,55.88 36.96,56.77 36.96,58.55 35.94,59.56 35.94,62.87 | C7.1 35.94,62.87 | C2.1 35.94,62.87
  Bottom 1.422: JP11.1 19.18,10.92 23.37,6.73 27.94,6.73 31.37,10.16 31.37,23.62 36.2,28.45 v38.99,28.45
VCC1  (via drill 0.9, 1.2)
  Top 1.422: v89.53,57.78 89.53,54.74 87.5,52.7 v87.5,28.45
  Bottom 1.27: U2.2 U2.4 84.45,65.61 84.45,62.87 | v89.53,57.78 89.53,56.64 88.77,55.88 86.36,55.88 85.47,56.77 85.47,58.55 84.45,59.56 84.45,62.87 | C11.1 84.45,62.87 | C10.1 84.45,62.87
  Bottom 1.422: JP35.1 67.69,10.92 71.88,6.73 76.45,6.73 79.88,10.16 79.88,23.62 84.71,28.45 v87.5,28.45

## Text on the board
tPlace: 100k | 10n | 100k | 10n | 1M | 1M | 100n | 10K | 100n | 10K | 555 | 555 | 4K7 | 4K7 | 1u | 4148 | 1u | 4148 | 4148 | 4148 | 330 | 330 | 1K5 | 1K5 | 10K | 10K | VCC | TX | RX | GND | A+ | B- | VCC | TX | RX | GND | A+ | B- | 470u/35V | 470u/35V | VCC | VCC | GND | VCC | SIG | GND | A+ | B- | TX | GND | VCC | SIG | GND | A+ | B- | TX
bPlace: LT1117 | LT1117 | 22u | 22u | 22u | 100n | 22u | 100n